# EAGLE board PISO (EAGLE 9.7.0)

Size 170.78 x 59.42 mm. Coordinates in mm from the lower left corner, seen from the top.
Outline: 0,0 170.78,0 170.78,59.42 0,59.42 0,0
Copper layers (1*16): Top 0.035mm / dielectric 1.5mm / Bottom 0.035mm
Design rules "default": minimum track width 6mil, minimum drill 0.35mm, track to track 6mil, track to pad 6mil, pad to pad 6mil, via to via 6mil, smd to smd 6mil, copper to edge 40mil, drill to drill 6mil, minimum pad ring 10mil, minimum via ring 8mil, stop-mask expansion 4mil, vias tented up to drill 0mil, thermal gap 10mil

## Footprints (pad centres in the part's own frame; a part is rotated, then mirrored left to right if it is on the bottom)
LEDRD254W60D565H860B = drill 0.981 pad 1.581: 1 -1.27,0; 2 1.27,0
BATTERY-GENERIC = drill 1.118 pad 3.15 octagon: + 2.54,0; - -2.54,0
RESAD1016W63L850D250B = drill 0.83 pad 1.43: 1 -5.08,0; 2 5.08,0
78B04ST = drill 0.8: 1 -3.81,-3.81; 2 -1.27,-3.81; 3 1.27,-3.81; 4 3.81,-3.81; 5 3.81,3.81; 6 1.27,3.81; 7 -1.27,3.81; 8 -3.81,3.81
DIP762W53P254L1969H508Q14B = drill 0.743 pad 1.343: 1 -3.81,7.62; 2 -3.81,5.08; 3 -3.81,2.54; 4 -3.81,0; 5 -3.81,-2.54; 6 -3.81,-5.08; 7 -3.81,-7.62; 8 3.81,-7.62; 9 3.81,-5.08; 10 3.81,-2.54; 11 3.81,0; 12 3.81,2.54; 13 3.81,5.08; 14 3.81,7.62

## Placement (x,y rotation side)
D1  RED  [LEDRD254W60D565H860B]  163.18,51.52 180 top
P1  BATTERYGENERIC  [BATTERY-GENERIC]  8.26,35.54 180 top
R1  1k  [RESAD1016W63L850D250B]  164.45,46.44 90 top
SW3  SPST-478B04ST  [78B04ST]  41.27,9.53 0 top
SW4  SPST-478B04ST  [78B04ST]  53.97,9.53 0 top
U1  74HC04_PDIP  [DIP762W53P254L1969H508Q14B]  67.94,9.53 90 top
U2  74HC74_PDIP  [DIP762W53P254L1969H508Q14B]  88.26,9.53 90 top
U3  74HC08_PDIP  [DIP762W53P254L1969H508Q14B]  111.12,9.53 90 top
U4  74HC32_PDIP  [DIP762W53P254L1969H508Q14B]  128.9,9.53 90 top
U5  74HC74_PDIP  [DIP762W53P254L1969H508Q14B]  154.3,9.53 90 top

## Library data of the parts
D1 = Tinkercad; CATEGORY: Opto-Electronic; SUB-CATEGORY: LED; VALUE: LED_RED
P1 R1 SW3 SW4 U1-U5 = Tinkercad

## Nets
D1_A: D1.1 R1.2
P1+: P1.+ SW3.5 SW3.7 SW3.8 SW4.6 SW4.7 SW4.8 U1.14 U2.4 U2.10 U2.14 U3.14 U4.14 U5.4 U5.14
P1-: D1.2 P1.- U1.7 U2.7 U3.7 U4.7 U5.7
U1_1Y: U1.2 U3.2 U3.10
U2_CLK1: SW3.1 U2.3 U2.11 U5.3
U2_CLR1: SW3.2 U2.1 U2.13 U5.1
U2_D1: SW4.1 U2.2
U2_D2: U2.12 U4.3
U3_1A: U2.5 U3.1
U3_2B: SW4.2 U3.5
U3_3A: U2.9 U3.9
U3_3Y: U3.8 U4.9
U3_4A: SW4.3 U3.12
U3_4B: SW3.4 U1.1 U3.4 U3.13
U4_1A: U3.3 U4.1
U4_1B: U3.6 U4.2
U4_3Y: U4.8 U5.2
U5_1Q: R1.1 U5.5

## Tracks (layer width: path | path; a pad name or v marks a point on that pad's centre or on a via)
D1_A  (1 unrouted)
P1+  (14 unrouted)
P1-  (6 unrouted)
U1_1Y  (2 unrouted)
U2_CLK1  (3 unrouted)
U2_CLR1  (3 unrouted)
U2_D1  (1 unrouted)
U2_D2  (1 unrouted)
U3_1A  (1 unrouted)
U3_2B  (1 unrouted)
U3_3A  (1 unrouted)
U3_3Y  (1 unrouted)
U3_4A  (1 unrouted)
U3_4B  (3 unrouted)
U4_1A  (1 unrouted)
U4_1B  (1 unrouted)
U4_3Y  (1 unrouted)
U5_1Q  (1 unrouted)